# Altium PCB Input_Accessory.PcbDoc (part 1 of 2)
Units mm, origin at the board's own origin, x right, y up, seen from the top; angles counter-clockwise.
Board outline 40.6 x 51.6 mm, 2 copper layers (L1_Top, L14_Bot), stack 1.671 mm thick; 44 components, 25 nets, 98 pads, 61 vias.
Unrouted connection lines stored in the file: 61.
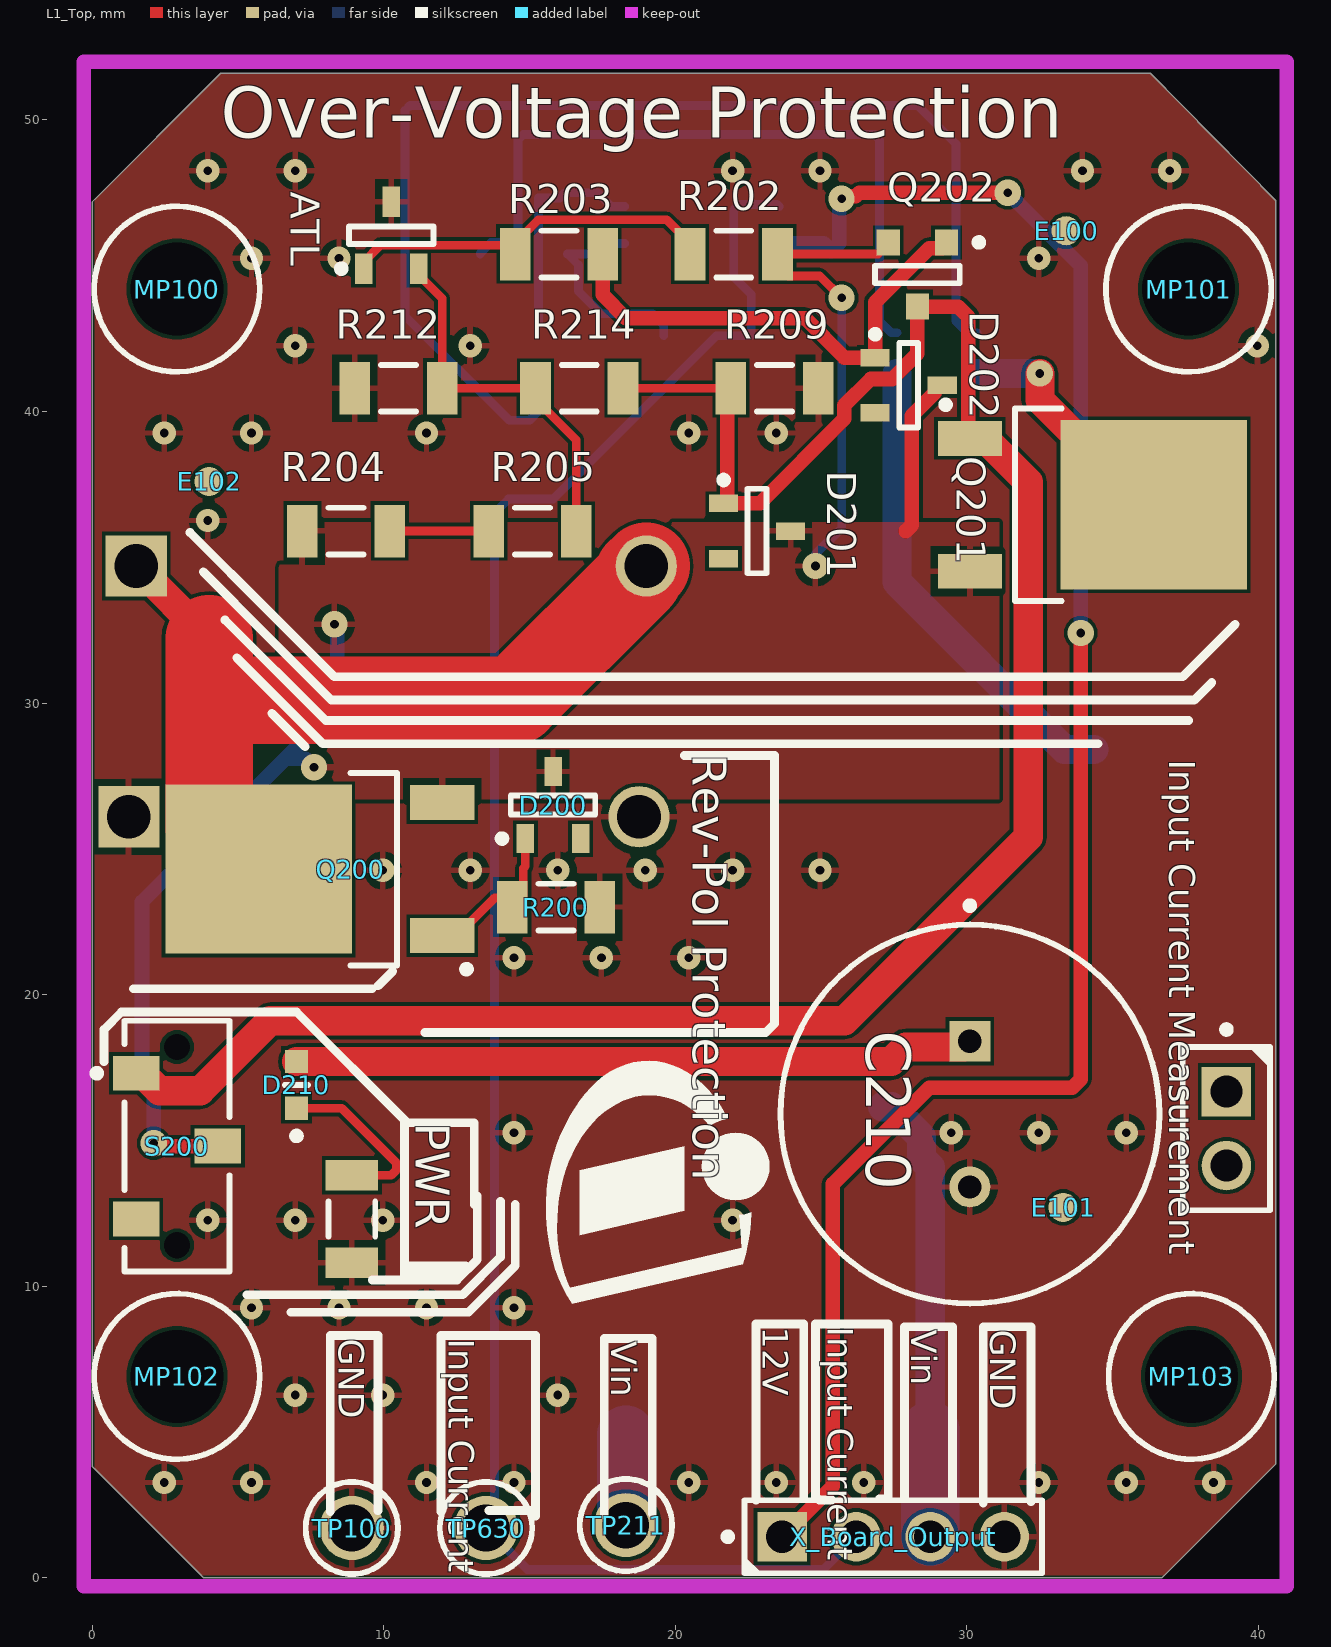
[diagram p0: L1_Top view]
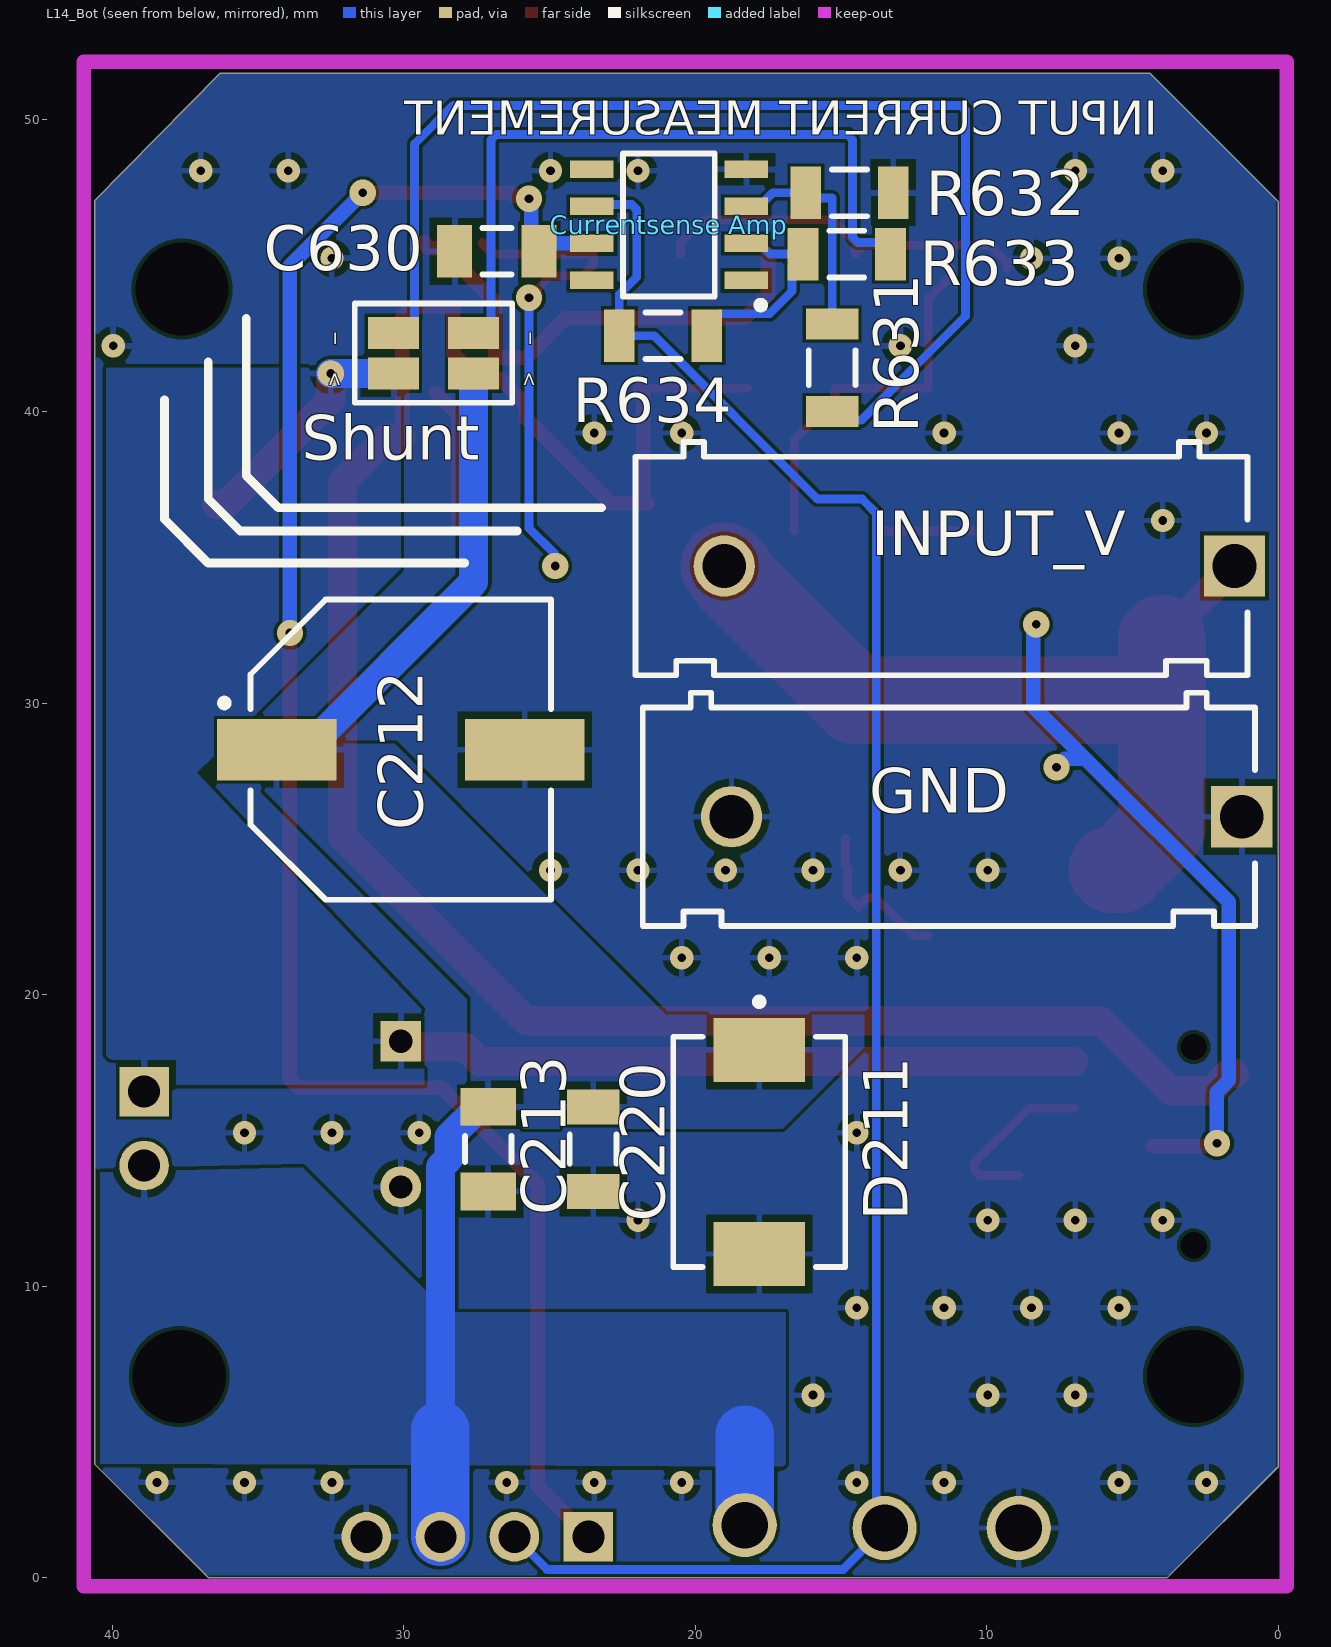
[diagram p1: L14_Bot view, seen from below]

## Layer stack, top to bottom
Top Solder: solder mask 0.0102, Solder Resist, Dk 3.5
L1_Top: signal copper 0.0356
Dielectric4: prepreg 1.6, FR-4, Dk 4.2
L14_Bot: signal copper 0.0356
Bottom Solder: solder mask 0.0102, Solder Resist, Dk 3.5

## Board outline
4.4,51.6 36.3,51.6 40.6,47.231 40.6,3.9 36.7,0 3.8,0 0,3.8 0,47.2

## Design rules (kind name [scope] priority, off if disabled: settings)
Clearance Clearance_HighVoltage [InNetClass('HighVoltage') vs Not InNetClass('HighVoltage')] p1 off: gap=0.5 ignorepadtopadclearanceinfootprint=FALSE except(0: Arc-Hole Track-Hole SMDPad-Hole THPad-Hole Via-Hole Fill-Hole Poly-Hole Region-Hole Text-Hole)
Clearance Clearance_BGA [WithinRoom('BGA_Fanout_Area')] p2 off: gap=0.1 ignorepadtopadclearanceinfootprint=FALSE except(0: Arc-Hole Track-Hole SMDPad-Hole THPad-Hole Via-Hole Fill-Hole Poly-Hole Region-Hole Text-Hole) // Clearance for BGA Fanout Area
Clearance Clearance_NDK [((HoleType ='Round') and (PadisPlated = 'False')) and not (Holesize ='0')  or ((HoleType ='Slot') and (PadisPlated = 'False')) and not (Holesize ='0')] p3 off: gap=0.5 ignorepadtopadclearanceinfootprint=FALSE except(0: Arc-Hole Track-Hole SMDPad-Hole THPad-Hole Via-Hole Fill-Hole Poly-Hole Region-Hole Text-Hole) // Clearance Non Plated Holes
Clearance Clearance_Fiducials [InComponentClass('Fiducials')] p4 off: gap=1 ignorepadtopadclearanceinfootprint=FALSE except(0: Arc-Hole Track-Hole SMDPad-Hole THPad-Hole Via-Hole Fill-Hole Poly-Hole Region-Hole Text-Hole)
Clearance Clearance_Edge_Fiducials [InComponentClass('Fiducials')] p5 off: gap=6 ignorepadtopadclearanceinfootprint=FALSE except(0: Arc-Hole Track-Hole SMDPad-Hole THPad-Hole Via-Hole Fill-Hole Poly-Hole Region-Hole Text-Hole) // Protel DXP Scope 2 Expression Was: IsBoardOutline
Clearance Clearance_All [All] p6: gap=0.12 ignorepadtopadclearanceinfootprint=FALSE except(0: Arc-Hole Track-Hole SMDPad-Hole THPad-Hole Via-Hole Fill-Hole Poly-Hole Region-Hole Text-Hole) // minimum Clearance on PCB
ComponentClearance ComponentClearance_All [All] p1: gap=0.2 collisioncheckmode=3 verticalgap=1 showdistances=FALSE
DiffPairsRouting DiffPairsRouting_Z0_DIFF_100R [InNetClass('Z0_DIFF_100R')] p1: maxlimit=0.2 minlimit=0.2 mostfreqgap=0.2 toplayer_minwidth=0.381 toplayer_maxwidth=0.381 toplayer_prefwidth=0.381 bottomlayer_minwidth=0.381 bottomlayer_maxwidth=0.381 bottomlayer_prefwidth=0.381 maxuncoupledlength=25
DiffPairsRouting DiffPairsRouting_All [All] p2: maxlimit=0.5 minlimit=0.12 mostfreqgap=0.15 toplayer_minwidth=0.381 toplayer_maxwidth=0.381 toplayer_prefwidth=0.381 bottomlayer_minwidth=0.381 bottomlayer_maxwidth=0.381 bottomlayer_prefwidth=0.381 maxuncoupledlength=25
FabricationTestPointUsage TestPointUsage [All] p1: valid=0 allowmultiple=FALSE
FabricationTestpoint Testpoint [All] p1: side=3 testpointundercomponent=TRUE minsize=1 maxsize=2.5 preferedsize=1.5 minholesize=0 maxholesize=1 preferedholesize=0.8 testpointgrid=0.025 allowsidetop=TRUE allowsidebottom=TRUE usegrid=TRUE gridtolerance=0
FanoutControl Fanout_LCC [All] p1 off: bgadir=Out bgaviamode=Centered fanoutstyle=Auto fanoutdirection=Alternating viagrid=0.025 // Protel DXP Scope 1 Expression Was: IsLCC   Fanout_LCC (Default Rule)
FanoutControl Fanout_BGA [All] p2 off: bgadir=Out bgaviamode=Centered fanoutstyle=Auto fanoutdirection=Alternating viagrid=0.025 // Protel DXP Scope 1 Expression Was: IsBGA   Fanout_BGA (Default Rule)
FanoutControl Fanout_SOIC [All] p3 off: bgadir=Out bgaviamode=Centered fanoutstyle=Auto fanoutdirection=Alternating viagrid=0.025 // Protel DXP Scope 1 Expression Was: IsSOIC   Fanout_SOIC (Default Rule)
FanoutControl Fanout_Default [All] p4: bgadir=Out bgaviamode=Centered fanoutstyle=Auto fanoutdirection=Alternating viagrid=0.025 // Fanout_Default (Default Rule)
FanoutControl Fanout_Small [All] p5 off: bgadir=Out bgaviamode=Centered fanoutstyle=Auto fanoutdirection=Alternating viagrid=0.025 // Protel DXP Scope 1 Expression Was: (CompPinCount < 5)   Fanout_Small (Default Rule)
Height Height_Top_In_Area [WithinRoom('Height_Top_Area')] p1: minheight=0 maxheight=8.4 prefheight=5.7 // Dedicated Height Constraint in Area
Height Height_Bot_No_Constraint [InComponentClass('Height_Bottom_exclude')] p2: minheight=0 maxheight=999 prefheight=12.7 // no max. Height constraint on Bottom Side
Height Height_Top_No_Constraint [InComponentClass('Height_Top_exclude')] p3: minheight=0 maxheight=999 prefheight=12.7 // no max. Height constraint on Top Side
Height Height_Bot [OnBottom] p4: minheight=0 maxheight=3 prefheight=2.5 // max. Component Height on PCB Bottom Side
Height Height_All [All] p5: minheight=0 maxheight=50 prefheight=12.7 // Default Component Height
HoleSize HoleSize_All [All] p1: absolutevalues=TRUE maxlimit=3 minlimit=0.2 maxpercent=80.000 minpercent=20.000
HoleToHoleClearance [All] p1: gap=0.25 allowstackedmicrovias=TRUE
Length Length_HighSpeed [InNetClass('HighSpeed')] p1: maxlimit=250 minlimit=0
Length Length_Default [InNetClass('TraceLength')] p2: maxlimit=500 minlimit=0 // min./max. Trace Length will be applied
MatchedLengths MatchedLengths_HighSpeed [InNetClass('HighSpeed')] p1: tolerance=25.4 checknetsindiffpair=FALSE checkdiffpairvsdiffpair=TRUE checkxsignals=TRUE checkothers=TRUE
MatchedLengths MatchedLengths_Default [InNetClass('MatchedLength')] p2: tolerance=100.5 checknetsindiffpair=TRUE checkdiffpairvsdiffpair=FALSE checkxsignals=FALSE checkothers=FALSE // Default Length Matching
MaxMinImpedance MaxMinImpedance_Z0_50R [InNetClass('Z0_50R')] p1: minimum=45,00 maximum=55,00 // Impedance Tolerance for 50 Ohms Traces
MaxMinImpedance MaxMinImpedance_All [All] p2: minimum=30,00 maximum=80,00 // Default Impedance Tolerance
MaximumViaCount MaximumViaCount_CLK [InNetClass('Clock')] p1: limit=10
MaximumViaCount MaximumViaCount_HighSpeed [InNetClass('HighSpeed')] p2: limit=10 // Max. Number of Vias in Net
MinimumAnnularRing MinimumAnnularRing_All [All] p1: minimumring=0.15
MinimumSolderMaskSliver [All] p1: minsoldermaskwidth=0.2
NetAntennae NetAntennae_High_Speed [InNetClass('HighSpeed')] p1: netantennaetolerance=3
NetAntennae NetAntennae_All [All] p2: netantennaetolerance=10
ParallelSegment ParallelSegment_Broad_Default [InNetClass('XTalk_Broadside_Coupled') vs InNetClass('HighSpeed') Or InNetClass('XTalk_Broadside_Coupled') Or InNetClass('XTalk_Edge_Coupled')] p1: limit=15 gap=0.2 // Default Rule for Broadside-Coupled Traces
ParallelSegment ParallelSegment_Edge_Default [InNetClass('XTalk_Edge_Coupled') vs InNetClass('HighSpeed') Or InNetClass('XTalk_Broadside_Coupled') Or InNetClass('XTalk_Edge_Coupled')] p2: limit=15 gap=0.12 // Default Rule for Edge-Coupled Traces
ParallelSegment ParallelSegment_Default [InNetClass('HighSpeed') vs InNetClass('HighSpeed')] p3: limit=25 gap=0.12 // Max. Coupled Length for all High-Speed Signals
PlaneClearance PlaneClearance_HighVoltage [InNetClass('HighVoltage')] p1: clearance=0.5
PlaneClearance [All] p2: clearance=0.2
PlaneConnect PlaneConnect_All [All] p1: planeconnectstyle=Direct reliefexpansion=0.2 reliefentries=4 reliefconductorwidth=0.25 reliefairgap=0.2
PolygonConnect PolygonConnect_HighCurrent [(OnTopLayer Or OnBottomLayer) And InNetClass('HighCurrent')] p1: connectstyle=Relief reliefconductorwidth=0.25 reliefentries=4 polygonreliefangle="90 Angle" airgapwidth=0.25
PolygonConnect PolygonConnect_Outer [OnTopLayer Or OnBottomLayer] p2: connectstyle=Relief reliefconductorwidth=0.2 reliefentries=4 polygonreliefangle="90 Angle" airgapwidth=0.25 // Polygon Connection on outer Layers
PolygonConnect PolygonConnect_All [All] p3: connectstyle=Direct reliefconductorwidth=0.2 reliefentries=4 polygonreliefangle="90 Angle" airgapwidth=0.25 // Default Polygon Connection
RoutingCorners [All] p1: cornerstyle=45-Degree minsetback=2 maxsetback=2
RoutingTopology RoutingTopology_CLK [InNetClass('Clock')] p1: topology=Daisy_Balanced
RoutingTopology RoutingTopology_HighSpeed [InNetClass('HighSpeed')] p2: topology=Daisy_Simple
RoutingTopology RoutingTopology_All [All] p3: topology=Shortest
RoutingVias RoutingVias_HighCurrent [InNetClass('HighCurrent')] p1: holewidth=0.3 width=0.9 viastyle="Through Hole" minholewidth=0.3 minwidth=0.9 maxholewidth=0.4 maxwidth=0.9 // Via Size for High-Current Nets
RoutingVias RoutingVias_BGA_Fanout [WithinRoom('BGA_Fanout_Area')] p2: holewidth=0.2 width=0.48 viastyle="Through Hole" minholewidth=0.2 minwidth=0.48 maxholewidth=0.3 maxwidth=0.8 // Via Size for BGA Fanout Area
RoutingVias RoutingVias_PWR [All] p3: holewidth=0.3 width=0.8 viastyle="Through Hole" minholewidth=0.25 minwidth=0.8 maxholewidth=0.3 maxwidth=0.9 // Via size for Power and GND nets
RoutingVias RoutingVias_All [All] p4: holewidth=0.25 width=0.65 viastyle="Through Hole" minholewidth=0.25 minwidth=0.6 maxholewidth=0.25 maxwidth=0.65 // Default Via size
SilkToSilkClearance [All] p1: silktosilkclearance=0.15
SilkToSolderMaskClearance SilkscreenOverComponentPads [IsPad] p1: minsilkscreentomaskgap=0.2 clearancetoexposedcopper=TRUE
SolderMaskExpansion SolderMaskExpansion_Via [IsVia] p1: expansion=0.102 istentingtop=TRUE
SolderMaskExpansion [All] p2: expansion=0.1 istentingtop=FALSE
StubLength StubLength_CLK [InNetClass('Clock')] p1: limit=25
StubLength StubLength_HighSpeed [InNetClass('HighSpeed')] p2: limit=30
SupplyNets SupplyNets_GND [InNet('GND')] p1: voltage=0,000
SupplyNets SupplyNets_12V [InNetClass('PWR_Supply_12V')] p2: voltage=12,00
SupplyNets SupplyNets_5V0 [InNetClass('PWR_Supply_5V0')] p3: voltage=5,000
SupplyNets SupplyNets_3V3 [InNetClass('PWR_Supply_3V3')] p4: voltage=3,000
SupplyNets SupplyNets_1V0 [InNetClass('PWR_Supply_1V0')] p5: voltage=1,000
Width Width_HighCurrent [All] p1: maxlimit=5 minlimit=0.3 preferedwidth=0.3 // Width for High-Current Traces
Width Width_BGA_Fanout [WithinRoom('BGA_Fanout_Area')] p2: maxlimit=1 minlimit=0.1 preferedwidth=0.1 // Trace Width for BGA Fanout Area
Width Width_Z0_DIFF_100R [InNetClass('Z0_DIFF_100R')] p3: maxlimit=0.12 minlimit=0.12 preferedwidth=0.12 minimp=50.000000 maximp=50.000000 favimp=50.000000
Width Width_Z0_50R [InNetClass('Z0_50R')] p4: maxlimit=0.16 minlimit=0.16 preferedwidth=0.16 minimp=50.000000 maximp=50.000000 favimp=50.000000
Width Width_PWR [InNetClass('Power')] p5: maxlimit=5 minlimit=0.2 preferedwidth=0.2 // Width for Power and GND nets
Width Width_All [All] p6: maxlimit=5 minlimit=0.12 preferedwidth=0.15 // minimum Width on PCB
10 further rules are at their usual default settings.

## Classes and differential pairs
component class U_Input: ATL C210 C212 C213 C220 C630 D200 D201 D202 D210 D211 "Input Current Measurement " PWR Q200 Q201 Q202 R200 R202 R203 R204 R205 R209 R212 R214 R631 R632 R633 R634 S200 Shunt TP211 TP630
component class 02_Top_Level: E100 E101 E102 GND INPUT_V MP100 MP101 MP102 MP103 TP100 X_Board_Output

## Components (designator, comment, footprint, x,y, rotation, side; value= is the part's Value field where it differs from the comment)
ATL "ATL431AQDBZR" SOT95P237X112-3N-1 10.25,46.05 r90 top (schematic designator D203)
C210 "1mF" CAPPRD500W60D1300H2700B 30.1,15.9 r270 top
C212 "220uF" CAPAE1030X1050N-3 30.1,28.4 r180 bottom
C213 "10uF" CAPC3216X190N-1 27.1,14.7 r90 bottom
C220 "100nF" CAPC3216X125N-0 23.5,14.7 r270 bottom
C630 "100nF" CAPC3216X125N-0 26.8,45.5 r180 bottom
"Currentsense Amp" "OPA197IDR" SOIC127P600X175-8N-23 20.9,46.4 r0 bottom (schematic designator U630)
D200 "12V" SOT95P230X110-3N 15.8,26.5 r90 top
D201 "12V" SOT95P230X110-3N 22.8,35.9 r0 top
D202 "12V" SOT95P230X110-3N 28,40.9 r0 top
D210 "Red" LEDSC160X80X80-2N-1 7,16.9 r90 top
D211 "SMDJ20A" DIOM7959X262N 17.8,14.6 r270 bottom
E100 "" fiducial 33.4,46.2 r90 top
E101 "" fiducial 33.3,12.7 r0 top
E102 "" fiducial 4,37.6 r90 top
GND "973 582-100" "CON-THT-973 582- 100" 10,26.1 r0 bottom (schematic designator X101)
"Input Current Measurement" "61300211121" CON-M-THT-61300211121 38.9,15.4 r270 top (schematic designator J211)
INPUT_V "973 582-101" "CON-THT-973 582- 101" 10.25,34.7 r0 bottom (schematic designator X100)
MP100 "0082 3 16" "SCREW_0082 3 16_NPTH" 2.9,44.2 r0 top
MP101 "0082 3 16" "SCREW_0082 3 16_NPTH" 37.6,44.2 r0 top
MP102 "0082 3 16" "SCREW_0082 3 16_NPTH" 2.9,6.9 r0 top
MP103 "0082 3 16" "SCREW_0082 3 16_NPTH" 37.7,6.9 r0 top
PWR "17.8k" RESC3216X60N 8.9,12.3 r270 top (schematic designator R210)
Q200 "IPD650P06NM" TO228P998X250-3N-V2 8.85,24.3 r180 top
Q201 "IPD650P06NM" TO228P998X250-3N-V2 33.25,36.8 r0 top
Q202 "ISS17EP06LM" SOT95P240X110-3N-1-V 28.3,44.7 r270 top
R200 "47k" RESC3216X60N 15.9,23 r180 top
R202 "47k" RESC3216X60N 22,45.4 r0 top
R203 "47k" RESC3216X60N 16,45.4 r180 top
R204 "100k" RESC3216X60N 8.7,35.9 r0 top
R205 "47k" RESC3216X60N 15.1,35.9 r180 top
R209 "47k" RESC3216X60N 23.4,40.8 r180 top
R212 "17.8k" RESC3216X60N 10.5,40.8 r180 top
R214 "1MEG" RESC3216X60N 16.7,40.8 r0 top
R631 "1.3k" RESC3216X60N 15.3,41.5 r90 bottom
R632 "64.9k" RESC3216X60N 14.7,47.5 r180 bottom
R633 "1.3k" RESC3216X60N 14.8,45.4 r0 bottom
R634 "64.9k" RESC3216X60N 21.1,42.6 r0 bottom
S200 "CL-SB-12A-01T" SW-SMD-CL-SB-12A-01T 2.9,14.8 r0 top
Shunt "15mR" RES-SMD-L4T12 28.975,42 r0 bottom (schematic designator R211)
TP100 "5011" CON-THT-TP-5011 8.9,1.7 r90 top
TP211 "5010" CON-THT-TP-5010 18.3,1.8 r90 top
TP630 "5010" CON-THT-TP-5010 13.5,1.7 r90 top
X_Board_Output "TSW-104-07-L-S" HDRV4W64P254_1X4_1022X254X838B 27.47,1.4 r0 top

## Footprints (in the part's own frame and the unit in brackets; to place one, negate y for a bottom-side part, rotate by r counter-clockwise, add the part's x,y. Pads: shape width x height; smd on the part's side, far side on the other; paste and mask are expansions set on the pad)
CAPAE1030X1050N-3 [mm] "Capacitor,Aluminum Electrolytic;10.30mm L X 10.30mm W X 10.50mm H"
  rect 4.1x2.1 smd paste+0 mask+0: 1(-4.25,0) 2(4.25,0)
  silkscreen extent -6.18,-5.15 5.15,5.15, body extent -5.5,-5.15 5.5,5.15, height 10.5
CAPC3216X125N-0 [mm] "Capacitor,non-polarized,Chip;3.20mm L X 1.60mm W X 1.25mm H"
  rect 1.2x1.8 smd paste+0 mask+0: 1(-1.45,0) 2(1.45,0)
  silkscreen extent -0.5,-0.8 0.5,0.8, body extent -1.6,-0.8 1.6,0.8, height 1.25
CAPC3216X190N-1 [mm] "Capacitor,non-polarized,Chip;3.20mm L X 1.60mm W X 1.90mm H"
  rect 1.3x1.9 smd paste+0 mask+0: 1(-1.45,0) 2(1.45,0)
  silkscreen extent -0.45,-0.8 0.45,0.8, body extent -1.6,-0.8 1.6,0.8, height 1.9
CAPPRD500W60D1300H2700B [mm] "Capacitor,polarized,Radial;5.00mm C X 0.60mm W 13.00mm Dia X 27.00mm H"
  rect 1.4x1.4 hole 0.8 mask+0: 1(-2.5,0)
  round 1.4 hole 0.8 mask+0: 2(2.5,0)
  silkscreen extent -7.27,-6.5 6.5,6.5, body extent -6.75,-6.75 6.75,6.75, height 27
CON-M-THT-61300211121 [mm] "Header, Vertical, 2.54mm Pitch; 2 Pins, Single row, 5.08mm L X 2.54mm W X 8.89mm H body"
  rect 1.7x1.7 hole 1.1 paste+0 mask+0: 1(-1.27,0)
  round 1.7 hole 1.1 paste+0 mask+0: 2(1.27,0)
  silkscreen extent -3.52,-1.5 2.8,1.5, body extent -2.54,-1.27 2.54,1.27, height 8.54
"CON-THT-973 582- 100" [mm] "Banana Jack, 2 pins, 17.5mm Pitch, 21mm L X 7.5mm W X 10.5mm H body"
  rect 2.1x2.1 hole 1.5 paste+0 mask+0: 1(-8.75,0)
  round 2.1 hole 1.5 paste+0 mask+0: 2(8.75,0)
  silkscreen extent -9.2,-4.25 11.8,3.75, body extent -9.2,-4.25 11.8,3.75, height 10.5
"CON-THT-973 582- 101" [mm] "Banana Jack, 2 pins, 17.5mm Pitch, 21mm L X 7.5mm W X 10.5mm H body"
  rect 2.1x2.1 hole 1.5 paste+0 mask+0: 1(-8.75,0)
  round 2.1 hole 1.5 paste+0 mask+0: 2(8.75,0)
  silkscreen extent -9.2,-4.25 11.8,3.75, body extent -9.2,-4.25 11.8,3.75, height 10.5
CON-THT-TP-5010 [mm] "Test Point, 1.78 mm Lead Width, Round, 3.17 mm Dia X 8.28 mm H body"
  round 2.2 hole 1.6 paste+0 mask+0: 1(0,0)
  silkscreen extent -1.58,-1.59 1.58,1.59, body extent -1.59,-1.59 1.59,1.59, height 8.13
CON-THT-TP-5011 [mm] "Test Point, 1.78 mm Lead Width, Round, 3.17 mm Dia X 8.28 mm H body"
  round 2.2 hole 1.6 paste+0 mask+0: 1(0,0)
  silkscreen extent -1.58,-1.59 1.58,1.59, body extent -1.59,-1.59 1.59,1.59, height 8.13
DIOM7959X262N [mm] "Diode,Molded Body;7.94mm L X 5.905mm W X 2.62mm H"
  rect 2.2x3.15 smd paste+0 mask+0: 1(-3.5,0) 2(3.5,0)
  silkscreen extent -5.27,-2.95 3.95,2.95, body extent -3.97,-2.95 3.97,2.95, height 2.62
fiducial [mm] "Fiducial Marker For PCB, 1mm"
  round 1 smd paste-0.5 mask+1: 1(0,0)
HDRV4W64P254_1X4_1022X254X838B [mm] "Header,vertical,2.54mm pitch;0.64mm lead width,4 pins,1 row,4 pins per row,10.225mm L X 2.54mm W X 8.38mm H body"
  rect 1.7x1.7 hole 1.1 paste+0 mask+0: 1(-3.81,0)
  round 1.7 hole 1.1 paste+0 mask+0: 2(-1.27,0) 3(1.27,0) 4(3.81,0)
  silkscreen extent -5.8,-1.25 5.1,1.25, body extent -5.08,-1.27 5.08,1.27, height 8.4
LEDSC160X80X80-2N-1 [mm] "LED,Side Concave; 2 pin,1.60mm W X 0.80mm L X 0.80mm H"
  rect 0.8x0.8 smd paste+0 mask+0: 1(-0.8,0) 2(0.8,0)
  silkscreen extent -1.87,-0.4 0,0.4, body extent -0.8,-0.4 0.8,0.4, height 0.7
RES-SMD-L4T12 [mm] "Resistor, SMD, 4 pin, 3.00 mm L X 1.60 mm W X 0.65 mm H body"
  rect 1.75x1.1 smd paste+0 mask+0: 1(-1.375,0.7) 2(1.375,0.7) 3(-1.375,-0.7) 4(1.375,-0.7)
  silkscreen extent -2.7,-1.7 2.7,1.7, body extent -1.5,-0.8 1.5,0.8, height 0.65
RESC3216X60N [mm]
  rect 1.05x1.8 smd paste+0 mask+0: 1(-1.5,0) 2(1.5,0)
  silkscreen extent -0.6,-0.8 0.6,0.8, body extent -1.6,-0.8 1.6,0.8, height 0.55
"SCREW_0082 3 16_NPTH" [mm] "M3 Cheese Head Screw X 5.68mm Head"
  round 0 hole 3.2 unplated paste+0 mask+0: ""(0,0)
  silkscreen extent -2.84,-2.84 2.84,2.84, body extent -2.84,-2.84 2.84,2.84, height 3
SOIC127P600X175-8N-23 [mm] "SOIC,1.27mm pitch;8 pin,3.895mm W X 4.905mm L X 1.75mm H body"
  rect 1.5x0.6 smd paste+0 mask+0: 1(-2.65,1.905) 2(-2.65,0.635) 3(-2.65,-0.635) 4(-2.65,-1.905) 5(2.65,-1.905) 6(2.65,-0.635) 7(2.65,0.635) 8(2.65,1.905)
  silkscreen extent -3.27,-2.45 1.58,2.87, body extent -2.99,-2.45 2.99,2.45, height 1.75
SOT95P230X110-3N [mm] "SOT,0.95mm pitch;3 pin,1.30mm W X 2.90mm L X 1.10mm H body"
  rect 1x0.6 smd paste+0 mask+0: 1(-1.15,0.95) 2(-1.15,-0.95) 3(1.15,0)
  silkscreen extent -1.27,-1.45 0.33,1.87, body extent -1.15,-1.45 1.15,1.45, height 1.11
SOT95P237X112-3N-1 [mm] "SOT,0.95mm pitch;3 pin,1.30mm W X 2.92mm L X 1.12mm H body"
  rect 1.05x0.6 smd paste+0 mask+0: 1(-1.15,0.95) 2(-1.15,-0.95) 3(1.15,0)
  silkscreen extent -1.27,-1.45 0.3,1.83, body extent -1.18,-1.46 1.18,1.46, height 1.12
SOT95P240X110-3N-1-V [mm] "SOT,0.95mm pitch;3 pin,1.30mm W X 2.90mm L X 1.10mm H body"
  rect 0.9x0.8 smd paste+0 mask+0: 1(-1.1,1) 2(-1.1,-1) 3(1.1,0)
  silkscreen extent -1.22,-1.45 0.3,2.23, body extent -1.21,-1.45 1.19,1.45, height 1.1
SW-SMD-CL-SB-12A-01T [mm] "Switch, SMD, 3 Pins, 3.50 mm W X 8.50 mm L X 6.10 mm H body"
  rect 1.6x1.2 smd paste+0 mask+0: 1(-1.4,2.5) 2(1.4,0) 3(-1.4,-2.5)
  round 0 hole 0.9 unplated paste+0 mask+0: ""(0,-3.4) ""(0,3.4)
  silkscreen extent -2.87,-4.3 1.8,4.3, body extent -1.75,-4.25 1.75,4.25, height 5.5
TO228P998X250-3N-V2 [mm] "TO,2.28mm pitch;2 pin,9.98mm L X 6.50mm W X 2.50mm H body"
  rect 2.2x1.2 smd paste-0.05 mask+0: 1(-3.15,2.28) 3(-3.15,-2.28)
  rect 6.4x5.8 smd paste-2.9 mask+0: 2(3.15,0)
  silkscreen extent -4.11,-3.3 0,3.55, body extent -3.94,-3.25 6.04,3.25, height 2.36

## Part data
ATL: library part 644060, "ATL431 Adjustable Precision Shunt Regulator", Manufacturer="Texas Instruments", Package Description="SOT,0.95mm pitch;3 pin,1.30mm W X 2.92mm L X 1.12mm H body", Temperature max=125, Temperature min=-40, Temperature Range=Automotive, Voltage DC (max)=na, Article Number=644060, Automotive Qualified=No, Combined Parameters="- -;Vdc min/max:-;Iout:-;Fmax:-", ComponentLink1Description="Vendor WebSite", ComponentLink1URL=http://www.ti.com, ComponentLink2Description=Datasheet, ComponentLink2URL=http://webnetprod.muc.infineon.com/PCBPortal_Prod/WorkFlows/AltiumComponent/StandardDocumentation?Versionid=644061, ComponentStatus=Released, Legacy DeviceID=TI_ATL431AQDBZR, Manufacturer Order Number=ATL431AQDBZR, PackageReference="SOT23-3 (DBZ)", Part Type="Integrated Circuit", PLMStatus=Active, QuickPick="SOT23-3 (DBZ)", RoHS Compliant=Y, Second Source allowed=Yes, Supplier 1=Farnell, Supplier 2=DigiKey, Supplier 3=Mouser, Supplier Part Number 2=296-47201-1-ND, Supplier Part Number 3=595-ATL431AQDBZR, Symbol type="TVS Diode Symbol, 1 Cathode, 2 Reference , 3 Anode", Version Number=V01
C210: library part 646789, "CAP / ELCO / 1mF / 35V / 20% / Aluminiumelectrolytic / -40°C to 105°C / 5.00mm C X 0.60mm W 13.00mm Dia X 27.00mm H / - / -", Manufacturer=Kemet, Package Description="Capacitor,polarized,Radial;5.00mm C X 0.60mm W 13.00mm Dia X 27.00mm H", Supplier Part Number 1=2835188, Temperature max=105, Temperature min=-40, Temperature Range=Industrial, Tolerance Neg=20%, Voltage DC (max)=35V, Alternate View=Yes, Application=Standard, Article Number=646789, Automotive Qualified=No, Combined Parameters=TC:Aluminiumelectrolytic;Tol.:-20%/+20%;Vdc:35V, ComponentLink1Description="Vendor WebSite", ComponentLink1URL=http://www.kemet.com, ComponentLink2Description=Datasheet, ComponentLink2URL=http://webnetprod.muc.infineon.com/PCBPortal_Prod/WorkFlows/AltiumComponent/StandardDocumentation?Versionid=646790, ComponentStatus=Released, Manufacturer Order Number=ESY108M035AL4AA, Multible Parts=No, PackageReference=Radial, Part Type=Capacitor, PLMStatus=Active, QuickPick="1mF / 35V / 20% / Aluminiumelectrolytic / Radial", RoHS Compliant=Y, Second Source allowed=Yes, Style=Single, Supplier 1=Farnell, Supplier 2=DigiKey, Supplier 3=Mouser, Supplier Part Number 2=399-6120-ND, Supplier Part Number 3=80-ESY108M035AL4AA, Symbol type="Capacitor; Single; Polarized; 2 Pins; Pin 1 Positive", Technology=Electrolytic, Tolerance Pos=20%, Type=Polarized, Version Number=V01
C212: library part 699376, "CAP / ELCO / 220uF / 50V / 20% / Aluminiumelectrolytic / -55°C to 105°C / 10.30mm L X 10.30mm W X 10.50mm H / - / -", Manufacturer="Nippon Chemi-Con", Package Description="Capacitor,Aluminum Electrolytic;10.30mm L X 10.30mm W X 10.50mm H", Temperature max=105, Temperature min=-55, Temperature Range=Military, Tolerance Neg=20%, Voltage DC (max)=50V, Alternate View=Yes, Application=Standard, Article Number=699376, Automotive Qualified="AEC Q200", Combined Parameters=TC:Aluminiumelectrolytic;Tol.:-20%/+20%;Vdc:50V, ComponentLink1Description="Vendor WebSite", ComponentLink1URL=http://www.chemi-con.co.jp/e/, ComponentLink2Description=Datasheet, ComponentLink2URL=http://webnetprod.muc.infineon.com/PCBPortal_Prod/WorkFlows/AltiumComponent/StandardDocumentation?Versionid=699377, ComponentStatus=Released, Manufacturer Order Number=EMZL500ARA221MJA0G, Multible Parts=No, PackageReference=EMZL500ARA221MJA0G, Part Type=Capacitor, PLMStatus=Active, QuickPick="220uF / 50V / 20% / Aluminiumelectrolytic / EMZL500ARA221MJA0G", RoHS Compliant=Y, Second Source allowed=Yes, Style=Single, Supplier 1=Farnell, Supplier 2=DigiKey, Supplier 3=Mouser, Supplier Part Number 3=661-EMZL500ARA221MJA, Symbol type="Capacitor; Single; Polarized; 2 Pins; Pin 1 Positive", Technology=Electrolytic, Tolerance Pos=20%, Type=Polarized, Version Number=V00
C213: library part 648992, "CAP / CERA / 10uF / 50V / 20% / X5R (EIA) / -55°C to 85°C / 1206 (3216) / SMD / -", Manufacturer="Taiyo Yuden", Package Description="Capacitor,non-polarized,Chip;3.20mm L X 1.60mm W X 1.90mm H", Supplier Part Number 1=2779059, Temperature max=85, Temperature min=-55, Temperature Range=Military, Tolerance Neg=20%, Voltage DC (max)=50V, Alternate View=Yes, Application=Standard, Article Number=648992, Automotive Qualified=No, Combined Parameters="TC:X5R (EIA);Tol.:-20%/+20%;Vdc:50V", ComponentLink1Description="Vendor WebSite", ComponentLink1URL=http://www.yuden.co.jp/or/product/, ComponentLink2Description=Datasheet, ComponentLink2URL=http://webnetprod.muc.infineon.com/PCBPortal_Prod/WorkFlows/AltiumComponent/StandardDocumentation?Versionid=648993, ComponentStatus=Released, Manufacturer Order Number=UMK316BBJ106ML-T, Multiple Parts=No, PackageReference="1206 (3216)", Part Type=Capacitor, PLMStatus=Active, QuickPick="10uF / 50V / 20% / X5R (EIA) / 1206 (3216)", RoHS Compliant=Y, Second Source allowed=Yes, Style=Single, Supplier 1=Farnell, Supplier 2=DigiKey, Supplier 3=Mouser, Supplier Part Number 2=587-3248-1-ND, Supplier Part Number 3=963-UMK316BBJ106ML-T, Symbol type="Capacitor; Single; Standard; 2 Pins", Technology=Ceramic, Tolerance Pos=20%, Type=Standard, Version Number=V00
C220 C630: library part 282874, "CAP / CERA / 100nF / 50V / 10% / X7R (EIA) / -55°C to 125°C / 1206(3216) / SMD / -", Legacy PartNumber=CAP01005660, Manufacturer=MuRata, Package Description="Capacitor,non-polarized,Chip;3.20mm L X 1.60mm W X 1.25mm H", Package Imperial=1206, Package Metric=3216, Temperature max=125, Temperature min=-55, Temperature Range=Military, Tolerance Neg=10%, Voltage DC (max)=50V, Alternate View=Yes, Application=Standard, Article Number=282874, Automotive Qualified=No, Combined Parameters="TC:X7R (EIA);Tol.:-10%/+10%;Vdc:50V", ComponentLink1Description="Vendor WebSite", ComponentLink1URL=http://www.murata.com/, ComponentLink2Description=Datasheet, ComponentLink2URL=http://webnetprod.muc.infineon.com/PCBPortal_Prod/WorkFlows/AltiumComponent/StandardDocumentation?Versionid=282875, ComponentStatus=Released, Legacy DeviceID=CAP01005660, Manufacturer Order Number=GRM31MR71H104KA01, Multiple Parts=No, PackageReference="1206 (3216)", Part Type=Capacitor, PLMStatus=Obsolete, QuickPick="100nF / 50V / 10% / X7R (EIA) / 1206 (3216)", RoHS Compliant=Y, Second Source allowed=Yes, Style=Single, Supplier 1=Farnell, Supplier 2=DigiKey, Supplier 3=Mouser, Symbol type="Capacitor; Single; Standard; 2 Pins", Technology=Ceramic, Tolerance Pos=10%, Type=Standard, Version Number=V01
"Currentsense Amp": library part 699374, Manufacturer="Texas Instruments", Package Description="SOIC,1.27mm pitch;8 pin,3.895mm W X 4.905mm L X 1.75mm H body", Supplier Part Number 1=3117357, Temperature max=125, Temperature min=-40, Temperature Range=Automotive, Voltage DC (max)=na, Alternate View=Yes, Application="Power Electronics", Article Number=699374, Automotive Qualified=No, Combined Parameters=Res.:-;Fmax:10MHz, ComponentLink1Description="Vendor WebSite", ComponentLink1URL=http://www.ti.com, ComponentLink2Description=Datasheet, ComponentLink2URL=http://webnetprod.muc.infineon.com/PCBPortal_Prod/WorkFlows/AltiumComponent/StandardDocumentation?Versionid=699375, ComponentStatus=Released, Legacy DeviceID=TI_OPA197IDR, Manufacturer Order Number=OPA197IDR, Multiple Parts=Yes, PackageReference=SOIC, Part Type="Analog Parts", PLMStatus=Active, QuickPick="Amplifier / SOIC", RoHS Compliant=Y, Second Source allowed=Yes, Supplier 1=Farnell, Supplier 2=DigiKey, Supplier 3=Mouser, Supplier Part Number 2=296-43866-1-ND, Supplier Part Number 3=595-OPA197IDR, Symbol type="High-Precision, Low-Noise, Rail-to-Rail Output, JFET Op Amp", Type=Amplifier, Version Number=V00
D200 D201 D202: library part 659605, "Voltage regulator diodes", Manufacturer=Nexperia, Package Description="SOT,0.95mm,pitch;3 pin,1.30mm W X 2.90mm L X 1.10mm H body", Supplier Part Number 1=1081407, Temperature max=150, Temperature min=-65, Temperature Range=Military, Voltage DC (max)=na, Alternate View=Yes, Application=Standard, Article Number=659605, Automotive Qualified="AEC Q101", Combined Parameters=Vf:900mV;If:10mA;Ur:8V;Ir:100nA;Pmax:250mW, ComponentLink1Description="Vendor WebSite", ComponentLink1URL=http://www.nexperia.com, ComponentLink2Description=Datasheet, ComponentLink2URL=http://webnetprod.muc.infineon.com/PCBPortal_Prod/WorkFlows/AltiumComponent/StandardDocumentation?Versionid=659606, ComponentStatus=Released, Manufacturer Order Number=BZX84-C12,215, Multiple Parts=No, PackageReference=SOT-23, Part Type=Diode, PLMStatus=Active, QuickPick="Zener Diode / SOT-23", RoHS Compliant=Y, Second Source allowed=Yes, Style=Single, Supplier 1=Farnell, Supplier 2=DigiKey, Supplier 3=Mouser, Supplier Part Number 2=1727-2936-1-ND, Supplier Part Number 3=771-BZX84-C12-T/R, Symbol type="Standard Zener Diode, 3 Pins, 1 Anode, 2 Not Connected, 3 Cathode", Type="Zener Diode", Version Number=V00
D210: library part 625459, "WL-SMCW SMT Mono-color Chip LED Waterclear, Red,630nm", Manufacturer="Wurth Elektronik", Package Description="LED,Side Concave; 2 pin,1.60mm W X 0.80mm L X 0.80mm H", Supplier Part Number 1=2322071, Temperature max=85, Temperature min=-40, Temperature Range=Industrial, Voltage DC (max)=na, Application=Standard, Article Number=625459, Automotive Qualified=No, Combined Parameters=Vf:2.4V;If:30mA;Ur:5V;Ir:10uA;Pmax:72mW, ComponentLink1Description="Vendor WebSite", ComponentLink1URL=http://www.we-online.com, ComponentLink2Description=Datasheet, ComponentLink2URL=http://webnetprod.muc.infineon.com/PCBPortal_Prod/WorkFlows/AltiumComponent/StandardDocumentation?Versionid=625460, ComponentStatus=Released, Manufacturer Order Number=150060RS75000, PackageReference="1608 (0603)", Part Type=Diode, PLMStatus=Active, QuickPick="LED / 1608 (0603)", RoHS Compliant=Y, Second Source allowed=Yes, Style=Single, Supplier 1=Farnell, Supplier 2=DigiKey, Supplier 3=Mouser, Supplier Part Number 2=732-4978-1-ND, Supplier Part Number 3=710-150060RS75000, Symbol type="Standard LED Symbol, 1 Cathode, 2 Anode", Type=LED, Version Number=V01
D211: library part 646382, "TVS Diode, Low Profile Package, Built in Strain Relief, Glass Passivated Chip Junction", Manufacturer=Littelfuse, Package Description="Diode,Molded Body;7.94mm L X 5.905mm W X 2.62mm H", Supplier Part Number 1=2777300, Temperature max=150, Temperature min=-65, Temperature Range=Military, Voltage DC (max)=na, Application=Standard, Article Number=646382, Automotive Qualified=No, Combined Parameters=Vf:5V;If:-;Ur:20V;Ir:2uA;Pmax:6.5W, ComponentLink1Description="Vendor WebSite", ComponentLink1URL=http://www.littelfuse.com/, ComponentLink2Description=Datasheet, ComponentLink2URL=http://webnetprod.muc.infineon.com/PCBPortal_Prod/WorkFlows/AltiumComponent/StandardDocumentation?Versionid=646383, ComponentStatus=Released, Manufacturer Order Number=SMDJ20A, PackageReference=DO-214AB, Part Type=Diode, PLMStatus=Active, QuickPick="TVS Diode / DO-214AB", RoHS Compliant=Y, Second Source allowed=Yes, Style=Single, Supplier 1=Farnell, Supplier 2=DigiKey, Supplier 3=Mouser, Supplier Part Number 2=SMDJ20ACT-ND, Supplier Part Number 3=576-SMDJ20A, Symbol type="Transient Voltage Suppressor Diode (TVS, TAZ), 1 Cathode, 2 Anode", Type="TVS Diode", Version Number=V01
E100 E101 E102: library part 416637, "Fiducial Mark", Legacy PartNumber=MEC10000008, Manufacturer="Infineon Technologies", Temperature max=0, Temperature Range=Military, Voltage DC (max)=na, Alternate View=No, Article Number=416637, Combined Parameters="- - -x- -", ComponentLink1Description="Vendor WebSite", ComponentLink1URL=https://www.infineon.com/, ComponentLink2Description=Datasheet, ComponentLink2URL=http://webnetprod.muc.infineon.com/PCBPortal_Prod/WorkFlows/AltiumComponent/StandardDocumentation?Versionid=416638, ComponentStatus=Released, Legacy DeviceID=MEC_Fiducial_Mark, Multible Parts=No, Part Type=Mechanical, PLMStatus=Active, Second Source allowed=Yes, Supplier 1=Farnell, Supplier 2=DigiKey, Supplier 3=Mouser, Symbol type="Fiducial Marker For PCB", Temperature min=0, Version Number=V01
GND: library part 377401, "Banana Socket, black, 17.5mm Pitch", Legacy PartNumber=CON01500045, Manufacturer="Hirschmann Test & Measurement", Manufacturer Component Status=Active, Package Description="Banana Jack, 2 pins, 17.5mm Pitch, 21mm L X 7.5mm W X 10.5mm H body", Supplier Part Number 1=497344, Temperature max=85, Temperature min=-25, Temperature Range=Military, Voltage DC (max)=na, Article Number=377401, Automotive Qualified=No, Combined Parameters="Board-to-Cable Socket (female);-x-;Mounting:THT;Orient:90° (right angle);Shielded:No", ComponentLink1Description="Vendor WebSite", ComponentLink1URL=http://www.sks-kontakt.de/, ComponentLink2Description=Datasheet, ComponentLink2URL=http://webnetprod.muc.infineon.com/PCBPortal_Prod/WorkFlows/AltiumComponent/StandardDocumentation?Versionid=377402, ComponentStatus=Released, Legacy DeviceID="HTM_973 582- 100", Manufacturer Order Number="973 582-100", Part Type=Connector, PLMStatus=Active, QuickPick="90° (right angle) / Board-to-Cable", RoHS Compliant=N, Second Source allowed=Yes, Style=Banana, Supplier 1=Farnell, Supplier 2=DigiKey, Supplier 3=Mouser, Supplier Part Number 3=845-973582100, Symbol type="Banana Socket 2 Pins", Type=Board-to-Cable, Version Number=V01
"Input Current Measurement": library part 386760, "Header, 2.54mm Pitch, 2 pin, Vertical, Single Row", Legacy PartNumber=CON01500943, Manufacturer="Wurth Elektronik", Package Description="Header, Vertical, 2.54mm Pitch; 2 Pins, Single row, 5.08mm L X 2.54mm W X 8.89mm H body", Supplier Part Number 1=2356153, Temperature max=105, Temperature min=-40, Temperature Range=Industrial, Voltage DC (max)=na, Alternat View=Yes, Article Number=386760, Automotive Qualified=No, Combined Parameters="Board-to-Board Header (male);2x1;Mounting:THT;Orient:0° (vertical);Shielded:No", ComponentLink1Description="Vendor WebSite", ComponentLink1URL=http://www.we-online.com, ComponentLink2Description=Datasheet, ComponentLink2URL=http://webnetprod.muc.infineon.com/PCBPortal_Prod/WorkFlows/AltiumComponent/StandardDocumentation?Versionid=386761, ComponentStatus=Released, Legacy DeviceID=WE_61300211121, Manufacturer Order Number=61300211121, Part Type=Connector, PLMStatus=Active, QuickPick="0° (vertical) / Board-to-Board", RoHS Compliant=Y, Second Source allowed=Yes, Style=Strip, Supplier 1=Farnell, Supplier 2=DigiKey, Supplier 3=Mouser, Supplier Part Number 2=732-5315-ND, Supplier Part Number 3=710-61300211121, Type=Board-to-Board, Version Number=V01
INPUT_V: library part 377341, "Banana Socket, Red, 17.5mm Pitch", Legacy PartNumber=CON01500041, Manufacturer="Hirschmann Test & Measurement", Manufacturer Component Status=Active, Package Description="Banana Jack, 2 pins, 17.5mm Pitch, 21mm L X 7.5mm W X 10.5mm H body", Supplier Part Number 1=497332, Temperature max=85, Temperature min=-25, Temperature Range=Military, Voltage DC (max)=na, Article Number=377341, Combined Parameters="Board-to-Cable Socket (female);2x1;Mounting:THT;Orient:90° (right angle);Shielded:No", ComponentLink1Description="Vendor WebSite", ComponentLink1URL=http://www.sks-kontakt.de/, ComponentLink2Description=Datasheet, ComponentLink2URL=http://webnetprod.muc.infineon.com/PCBPortal_Prod/WorkFlows/AltiumComponent/StandardDocumentation?Versionid=377342, ComponentStatus=Released, Legacy DeviceID="HTM_973 582- 101", Manufacturer Order Number="973 582-101", Part Type=Connector, PLMStatus=Active, QuickPick="90° (right angle) / Board-to-Cable", RoHS Compliant=N, Second Source allowed=Yes, Style=Banana, Supplier 1=Farnell, Supplier 2=DigiKey, Supplier 3=Mouser, Supplier Part Number 3=845-973582101, Symbol type="Banana Socket 2 Pins", Type=Board-to-Cable, Version Number=V01
MP100 MP101 MP102 MP103: library part 455343, "Cheese Head Screw With Hexagon Socket, DIN 912 (ISO 4762), M3, 16mm length", Legacy PartNumber=MEC10000167, Manufacturer="Wurth Elektronik", Package Description="M3 Cheese Head Screw X 5.68mm Head", Temperature max=0, Temperature Range=Military, Voltage DC (max)=na, Alternate View=No, Article Number=455343, Automotive Qualified=No, Combined Parameters="Steel Hexagonal 19x5.68 Screw", ComponentLink1Description="Vendor WebSite", ComponentLink1URL=http://www.we-online.com, ComponentLink2Description=Datasheet, ComponentLink2URL=http://webnetprod.muc.infineon.com/PCBPortal_Prod/WorkFlows/AltiumComponent/StandardDocumentation?Versionid=455344, ComponentStatus=Released, Legacy DeviceID="MEC_0082 3 16", Manufacturer Order Number="0082 3 16", Multiple Parts=No, PackageReference=THT, Part Type=Mechanical, PLMStatus=Active, QuickPick=Screw, RoHS Compliant=N, Second Source allowed=Yes, Style=Hexagonal, Supplier 1=Farnell, Supplier 2=DigiKey, Supplier 3=Mouser, Symbol type="Cheese-Head Screw, M2.5X5-DIN 912", Temperature min=0, Type=Screw, Version Number=V01
PWR R212: library part 354312, "RES / STD / 17.8k / 250mW / 1% / 100ppm/K / -55°C to 155°C / 1206(3216) / SMD / -", Legacy PartNumber=RES01802883, Manufacturer=Vishay, Package Imperial=1206, Package Metric=3216, Temperature max=155, Temperature min=-55, Temperature Range=Military, Tolerance Neg=1%, Voltage DC (max)=200V, Alternate View=Yes, Article Number=354312, Automotive Qualified="AEC Q200", Combined Parameters=TCR:100ppm/K;Tol.:-1%/+1%;Vdc:200V;Idc:-;P:250mW, ComponentLink1Description="Vendor WebSite", ComponentLink1URL=http://www.vishay.com, ComponentLink2Description=Datasheet, ComponentLink2URL=http://webnetprod.muc.infineon.com/PCBPortal_Prod/WorkFlows/AltiumComponent/StandardDocumentation?Versionid=354313, ComponentStatus=Released, Legacy DeviceID=RES01802883, Manufacturer Order Number=CRCW120617K8FK, Multiple Parts=No, PackageReference="1206 (3216)", Part Type=Resistor, PLMStatus=Active, QuickPick="17.8k / 1% / 0.25 / 1206 (3216)", RoHS Compliant=Y, Second Source allowed=Yes, Style=Single, Supplier 1=Farnell, Supplier 2=DigiKey, Supplier 3=Mouser, Symbol type="Resistor; Single; Standard; 2 Pins", Technology="Thick Film", Tolerance Pos=1%, Type=Standard, Version Number=V01
Q200 Q201: library part 644075, "OptiMOS Power Transistor, -60 V", Manufacturer="Infineon Technologies", Package Description="TO,2.28mm pitch;2 pin,9.98mm L X 6.50mm W X 2.50mm H body", Supplier Part Number 1=3267848, Temperature max=175, Temperature min=-55, Temperature Range=Military, Voltage DC (max)=na, Application="Power Electronics", Article Number=644075, Automotive Qualified=No, Combined Parameters="P-Channel Enhancement;Uds:-60V;Id:-22A;Rds:65R;P:83W", ComponentLink1Description="Vendor WebSite", ComponentLink1URL=https://www.infineon.com/, ComponentLink2Description=Datasheet, ComponentLink2URL=http://webnetprod.muc.infineon.com/PCBPortal_Prod/WorkFlows/AltiumComponent/StandardDocumentation?Versionid=644076, ComponentStatus=Released, Legacy DeviceID=IFX_IPD650P06NM, Manufacturer Order Number=IPD650P06NM, PackageReference=PG-TO252-3-313, Part Type="Transistor FET", PLMStatus=Active, QuickPick="P-Channel Enhancement / 83W / -22A / -60V / PG-TO252-3-313", RoHS Compliant=Y, Second Source allowed=Yes, Style=Single, Supplier 1=Farnell, Supplier 2=DigiKey, Supplier 3=Mouser, Supplier Part Number 2=448-IPD650P06NMATMA1CT-ND, Supplier Part Number 3=726-IPD650P06NMATMA1, Symbol type="Insulated-Gate Field-Effect Transistor (IGFET), P-Channel, Enhancement,  Body Diode, Pin 1 Gate, 2 Drain, 3 Source, 3 Pins", Type="P-Channel Enhancement", Version Number=V01
Q202: library part 615536, "OptiMOSTM Small Signal Transistor, -60 V", Manufacturer="Infineon Technologies", Package Description="SOT,0.95mm,pitch;3 pin,1.30mm W X 2.90mm L X 1.10mm H body", Supplier Part Number 1=3267800, Temperature max=150, Temperature min=-55, Temperature Range=Military, Voltage DC (max)=na, Application="Small Signal", Article Number=615536, Automotive Qualified=No, Combined Parameters="P-Channel Enhancement;Uds:-60V;Id:-300mA;Rds:1.7R;P:360mW", ComponentLink1Description="Vendor WebSite", ComponentLink1URL=https://www.infineon.com/, ComponentLink2Description=Datasheet, ComponentLink2URL=http://webnetprod.muc.infineon.com/PCBPortal_Prod/WorkFlows/AltiumComponent/StandardDocumentation?Versionid=615537, ComponentStatus=Released, Legacy DeviceID=IFX_ISS17EP06LM, Manufacturer Order Number=ISS17EP06LM, PackageReference=PG-SOT23-3-5, Part Type="Transistor FET", PLMStatus=Active, QuickPick="P-Channel Enhancement / 360mW / -300mA / -60V / PG-SOT23-3-5", RoHS Compliant=Y, Second Source allowed=Yes, Style=Single, Supplier 1=Farnell, Supplier 2=DigiKey, Supplier 3=Mouser, Supplier Part Number 2=448-ISS17EP06LMXTSA1CT-ND, Supplier Part Number 3=726-ISS17EP06LMXTSA1, Symbol type="Insulated-Gate Field-Effect Transistor (IGFET), P-Channel, Enhancement,  Body Diode, Pin 1 Gate, 2 Source, 3 Drain, 3 Pins", Type="P-Channel Enhancement", Version Number=V01
R200 R202 R203 R205 R209: library part 354562, "RES / STD / 47k / 250mW / 1% / 100ppm/K / -55°C to 155°C / 1206(3216) / SMD / -", Legacy PartNumber=RES01802933, Manufacturer=Vishay, Package Imperial=1206, Package Metric=3216, Temperature max=155, Temperature min=-55, Temperature Range=Military, Tolerance Neg=1%, Voltage DC (max)=200V, Alternate View=Yes, Article Number=354562, Automotive Qualified="AEC Q200", Combined Parameters=TCR:100ppm/K;Tol.:-1%/+1%;Vdc:200V;Idc:-;P:250mW, ComponentLink1Description="Vendor WebSite", ComponentLink1URL=http://www.vishay.com, ComponentLink2Description=Datasheet, ComponentLink2URL=http://webnetprod.muc.infineon.com/PCBPortal_Prod/WorkFlows/AltiumComponent/StandardDocumentation?Versionid=354563, ComponentStatus=Released, Legacy DeviceID=RES01802933, Manufacturer Order Number=CRCW120647K0FK, Multiple Parts=No, PackageReference="1206 (3216)", Part Type=Resistor, PLMStatus=Active, QuickPick="47k / 1% / 0.25 / 1206 (3216)", RoHS Compliant=Y, Second Source allowed=Yes, Style=Single, Supplier 1=Farnell, Supplier 2=DigiKey, Supplier 3=Mouser, Symbol type="Resistor; Single; Standard; 2 Pins", Technology="Thick Film", Tolerance Pos=1%, Type=Standard, Version Number=V01
R204: library part 354752, "RES / STD / 100k / 250mW / 1% / 100ppm/K / -55°C to 155°C / 1206(3216) / SMD / -", Legacy PartNumber=RES01802971, Manufacturer=Vishay, Package Imperial=1206, Package Metric=3216, Temperature max=155, Temperature min=-55, Temperature Range=Military, Tolerance Neg=1%, Voltage DC (max)=200V, Alternate View=Yes, Article Number=354752, Automotive Qualified="AEC Q200", Combined Parameters=TCR:100ppm/K;Tol.:-1%/+1%;Vdc:200V;Idc:-;P:250mW, ComponentLink1Description="Vendor WebSite", ComponentLink1URL=http://www.vishay.com, ComponentLink2Description=Datasheet, ComponentLink2URL=http://webnetprod.muc.infineon.com/PCBPortal_Prod/WorkFlows/AltiumComponent/StandardDocumentation?Versionid=354753, ComponentStatus=Released, Legacy DeviceID=RES01802971, Manufacturer Order Number=CRCW1206100KFK, Multiple Parts=No, PackageReference="1206 (3216)", Part Type=Resistor, PLMStatus=Active, QuickPick="100k / 1% / 0.25 / 1206 (3216)", RoHS Compliant=Y, Second Source allowed=Yes, Style=Single, Supplier 1=Farnell, Supplier 2=DigiKey, Supplier 3=Mouser, Symbol type="Resistor; Single; Standard; 2 Pins", Technology="Thick Film", Tolerance Pos=1%, Type=Standard, Version Number=V01
R214: library part 355322, "RES / STD / 1MEG / 250mW / 1% / 100ppm/K / -55°C to 155°C / 1206(3216) / SMD / -", Legacy PartNumber=RES01803085, Manufacturer=Vishay, Package Imperial=1206, Package Metric=3216, Temperature max=155, Temperature min=-55, Temperature Range=Military, Tolerance Neg=1%, Voltage DC (max)=200V, Alternate View=Yes, Article Number=355322, Automotive Qualified="AEC Q200", Combined Parameters=TCR:100ppm/K;Tol.:-1%/+1%;Vdc:200V;Idc:-;P:250mW, ComponentLink1Description="Vendor WebSite", ComponentLink1URL=http://www.vishay.com, ComponentLink2Description=Datasheet, ComponentLink2URL=http://webnetprod.muc.infineon.com/PCBPortal_Prod/WorkFlows/AltiumComponent/StandardDocumentation?Versionid=355323, ComponentStatus=Released, Legacy DeviceID=RES01803085, Manufacturer Order Number=CRCW12061M00FK, Multiple Parts=No, PackageReference="1206 (3216)", Part Type=Resistor, PLMStatus=Active, QuickPick="1MEG / 1% / 0.25 / 1206 (3216)", RoHS Compliant=Y, Second Source allowed=Yes, Style=Single, Supplier 1=Farnell, Supplier 2=DigiKey, Supplier 3=Mouser, Symbol type="Resistor; Single; Standard; 2 Pins", Technology="Thick Film", Tolerance Pos=1%, Type=Standard, Version Number=V01
R631 R633: library part 353672, "RES / STD / 1.3k / 250mW / 1% / 100ppm/K / -55°C to 155°C / 1206(3216) / SMD / -", Legacy PartNumber=RES01802755, Manufacturer=Vishay, Package Imperial=1206, Package Metric=3216, Temperature max=155, Temperature min=-55, Temperature Range=Military, Tolerance Neg=1%, Voltage DC (max)=200V, Alternate View=Yes, Article Number=353672, Automotive Qualified="AEC Q200", Combined Parameters=TCR:100ppm/K;Tol.:-1%/+1%;Vdc:200V;Idc:-;P:250mW, ComponentLink1Description="Vendor WebSite", ComponentLink1URL=http://www.vishay.com, ComponentLink2Description=Datasheet, ComponentLink2URL=http://webnetprod.muc.infineon.com/PCBPortal_Prod/WorkFlows/AltiumComponent/StandardDocumentation?Versionid=353673, ComponentStatus=Released, Legacy DeviceID=RES01802755, Manufacturer Order Number=CRCW12061K30FK, Multiple Parts=No, PackageReference="1206 (3216)", Part Type=Resistor, PLMStatus=Active, QuickPick="1.3k / 1% / 0.25 / 1206 (3216)", RoHS Compliant=Y, Second Source allowed=Yes, Style=Single, Supplier 1=Farnell, Supplier 2=DigiKey, Supplier 3=Mouser, Symbol type="Resistor; Single; Standard; 2 Pins", Technology="Thick Film", Tolerance Pos=1%, Type=Standard, Version Number=V01
R632 R634: library part 354647, "RES / STD / 64.9k / 250mW / 1% / 100ppm/K / -55°C to 155°C / 1206(3216) / SMD / -", Legacy PartNumber=RES01802950, Manufacturer=Vishay, Package Imperial=1206, Package Metric=3216, Temperature max=155, Temperature min=-55, Temperature Range=Military, Tolerance Neg=1%, Voltage DC (max)=200V, Alternate View=Yes, Article Number=354647, Automotive Qualified="AEC Q200", Combined Parameters=TCR:100ppm/K;Tol.:-1%/+1%;Vdc:200V;Idc:-;P:250mW, ComponentLink1Description="Vendor WebSite", ComponentLink1URL=http://www.vishay.com, ComponentLink2Description=Datasheet, ComponentLink2URL=http://webnetprod.muc.infineon.com/PCBPortal_Prod/WorkFlows/AltiumComponent/StandardDocumentation?Versionid=354648, ComponentStatus=Released, Legacy DeviceID=RES01802950, Manufacturer Order Number=CRCW120664K9FK, Multiple Parts=No, PackageReference="1206 (3216)", Part Type=Resistor, PLMStatus=Active, QuickPick="64.9k / 1% / 0.25 / 1206 (3216)", RoHS Compliant=Y, Second Source allowed=Yes, Style=Single, Supplier 1=Farnell, Supplier 2=DigiKey, Supplier 3=Mouser, Symbol type="Resistor; Single; Standard; 2 Pins", Technology="Thick Film", Tolerance Pos=1%, Type=Standard, Version Number=V01
S200: library part 650099, "Slid Switch, 12V, 200mA", Manufacturer="NIDEC COPAL ELECTRONICS, Inc.", Package Description="Switch, SMD, 3 Pins, 3.50 mm W X 8.50 mm L X 6.10 mm H body", Supplier Part Number 1=2854744, Temperature max=85, Temperature min=-40, Temperature Range=Industrial, Voltage DC (max)=na, Application=Power, Article Number=650099, Automotive Qualified=No, ComponentLink1Description="Vendor WebSite", ComponentLink1URL=www.copal-electronics.com/, ComponentLink2Description=Datasheet, ComponentLink2URL=http://webnetprod.muc.infineon.com/PCBPortal_Prod/WorkFlows/AltiumComponent/StandardDocumentation?Versionid=650100, ComponentStatus=Released, Manufacturer Order Number=CL-SB-12A-01T, Part Type="Electro Mechanic", PLMStatus=Active, RoHS Compliant=Y, Second Source allowed=Yes, Supplier 1=Farnell, Supplier 2=DigiKey, Supplier 3=Mouser, Supplier Part Number 2=563-1314-1-ND, Supplier Part Number 3=229-CL-SB-12A-01T, Symbol type="Switch, 2 Change Over 1 3, 3 Pins", Version Number=V00
Shunt: library part 644055, "RES / STD / 15mR / 500mW / 1% / 75ppm/K / -55°C to 155°C / 1206 (3216) / SMD / -", Manufacturer=Ohmite, Package Description="Resistor, SMD, 4 pin, 3.00 mm L X 1.60 mm W X 0.65 mm H body", Supplier Part Number 1=3274221, Temperature max=155, Temperature min=-55, Temperature Range=Military, Tolerance Neg=1%, Alternate View=Yes, Application=Precision, Article Number=644055, Automotive Qualified=No, Combined Parameters=TCR:75ppm/K;Tol.:-1%/+1%;Vdc:-;Idc:-;P:500mW, ComponentLink1Description="Vendor WebSite", ComponentLink1URL=http://www.ohmite.com, ComponentLink2Description=Datasheet, ComponentLink2URL=http://webnetprod.muc.infineon.com/PCBPortal_Prod/WorkFlows/AltiumComponent/StandardDocumentation?Versionid=644056, ComponentStatus=Released, Manufacturer Order Number=L4T12FR015FER, Multiple Parts=No, PackageReference="1206 (3216)", Part Type=Resistor, PLMStatus=Active, QuickPick="15mR / 1% / 0.5 / 1206 (3216)", RoHS Compliant=Y, Second Source allowed=Yes, Style="4-Terminal (Shunt)", Supplier 1=Farnell, Supplier 2=DigiKey, Supplier 3=Mouser, Supplier Part Number 2=273-L4T12FR015FERCT-ND, Supplier Part Number 3=284-L4T12FR015FER, Symbol type="Resistor; 4-Terminal (Shunt); Standard; 4 Pins", Technology="Thick Film", Tolerance Pos=1%, Type=Standard, Version Number=V01
TP100: library part 382410, "PC Test Point-Multipurpose THT, Black", Legacy PartNumber=CON01500530, Manufacturer="Keystone Electronics Corp.", Package Description="Test Point, 1.78 mm Lead Width, Round, 3.17 mm Dia X 8.28 mm H body", Supplier Part Number 1=2431148, Temperature max=0, Temperature Range=Military, Voltage DC (max)=na, Alternate View=Yes, Application=Test, Article Number=382410, Automotive Qualified=No, Combined Parameters="Board-to-Cable None (onboard);1x1;Mounting:THT;Orient:0° (vertical);Shielded:No", ComponentLink1Description="Vendor WebSite", ComponentLink1URL=http://www.keyelco.com/, ComponentLink2Description=Datasheet, ComponentLink2URL=http://webnetprod.muc.infineon.com/PCBPortal_Prod/WorkFlows/AltiumComponent/StandardDocumentation?Versionid=382411, ComponentStatus=Released, Legacy DeviceID=KEY_5011, Manufacturer Order Number=5011, Multiple Parts=No, Part Type=Connector, PLMStatus=Active, QuickPick="0° (vertical) / Board-to-Cable", RoHS Compliant=Y, Second Source allowed=Yes, Style="Not Applicable", Supplier 1=Farnell, Supplier 2=DigiKey, Supplier 3=Mouser, Supplier Part Number 2=36-5011-ND, Supplier Part Number 3=534-5011, Symbol type="Connector, 1 Lead, Female", Temperature min=0, Type=Board-to-Cable, Version Number=V01